# Altium PCB SumoPCB.PcbDoc (part 2 of 2)
Units mm, origin at the board's own origin, x right, y up, seen from the top; angles counter-clockwise.
Board outline 140 x 140 mm, 2 copper layers (Top Layer, Bottom Layer); 162 components, 184 nets, 713 pads, 374 vias.
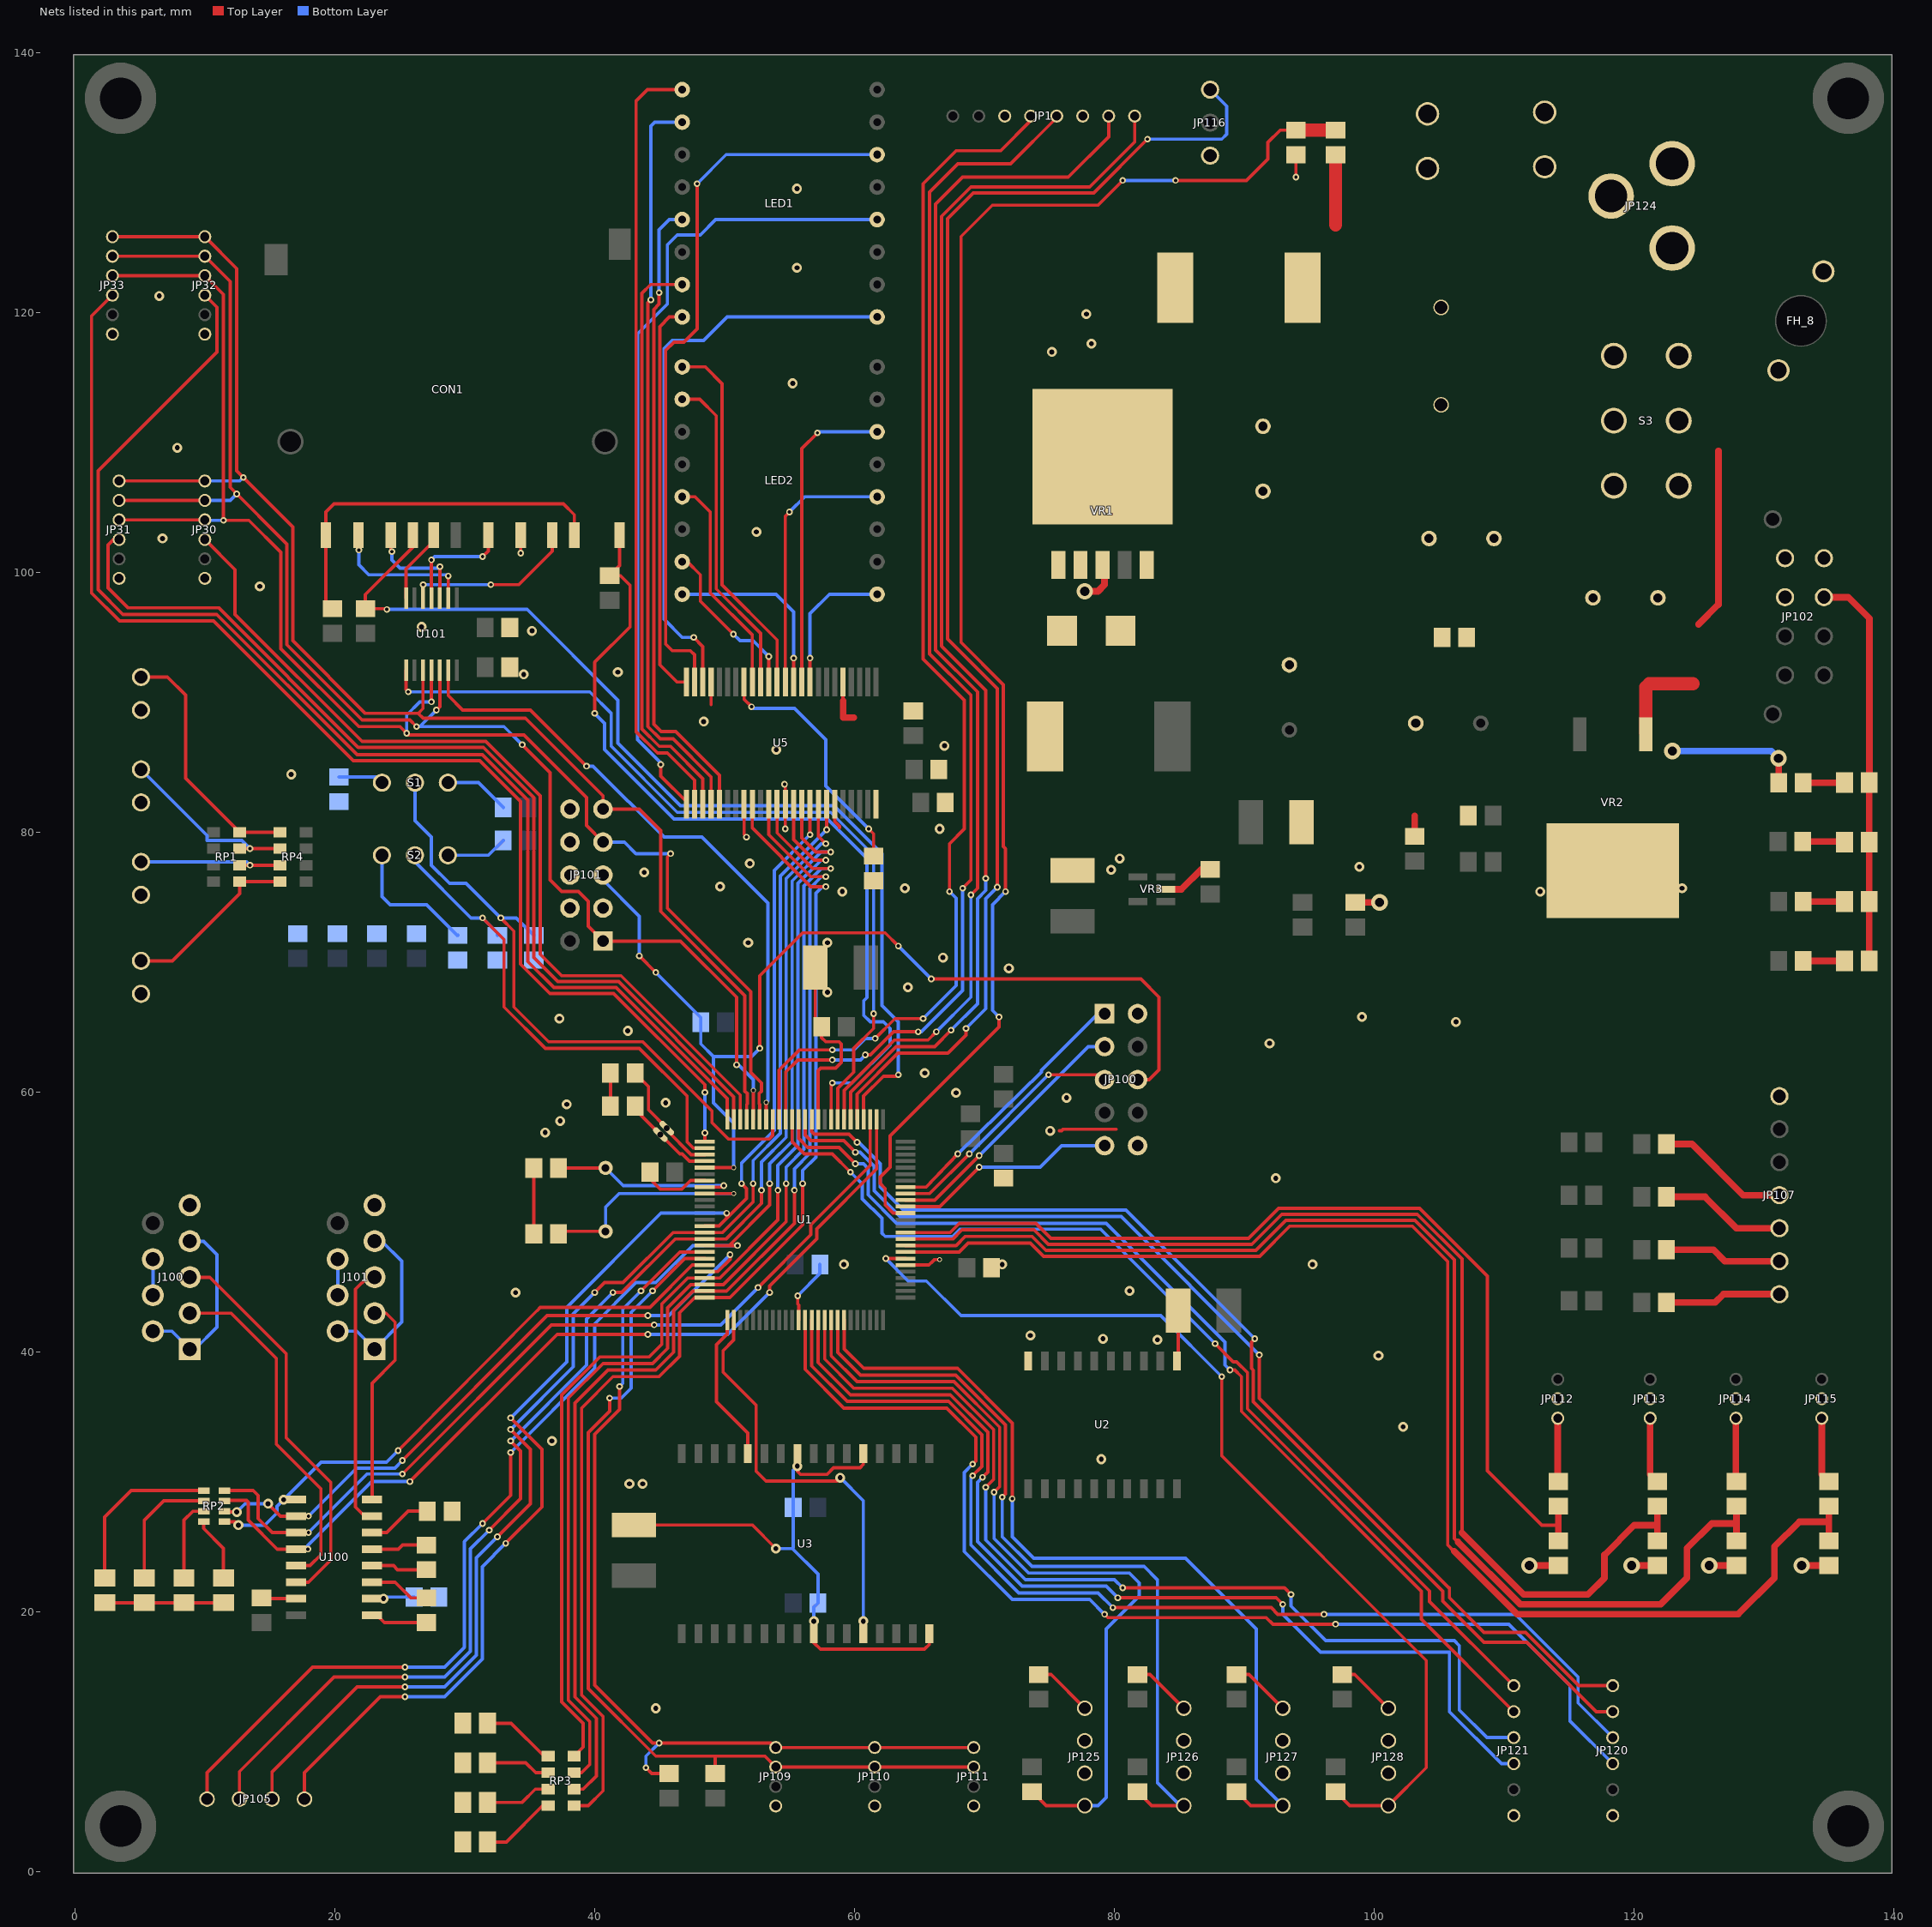
[diagram p2: the nets of this part, all layers, seen from the top]

## Via types
v1: diameter 0.508, hole 0.254, Top Layer to Bottom Layer, 222 vias
v2: diameter 0.762, hole 0.381, Top Layer to Bottom Layer, 100 vias
v3: diameter 1.27, hole 0.711, Top Layer to Bottom Layer, 39 vias
v4: diameter 0.889, hole 0.508, Top Layer to Bottom Layer, 7 vias
v5: diameter 0.381, hole 0.254, Top Layer to Bottom Layer, 6 vias

## Nets (pads, with @x,y where several pads share a name; then routed paths per layer and width w, separated by ;. In a path a pad name is that pad's centre, name@x,y a point inside that pad or via, vN(x,y) a via of type N, cw(c..) or ccw(c..) an arc to the next point about the centre after c; other vN are vias at no path point) (continued)
GND: C1.2 C2.2 C3.2 C4.1 C5.1 C6.1 C7.1 C10.1 C11.1 C12.1 C13.1 C14.1 C15.1 C39.2 C40.2 C41.2 C42.2 C43.2 C44.2 C45.2 C46.2 C47.2 C48.1 C49.1 C60.1 C61.2 C103.2 C104.2 C105.2 C110.1 C111.1 C113.2 C114.2 C115.1 C130.1 C131.1 C132.1 C133.1 CON1.3 CON1.6 D1.1 DS1.2 DS2.2 DS3.2 DS4.2 DS5.2 DS6.2 DS7.2 DS8.2 DS10.2 DS11.2 DS12.2 DS13.2 J100.5 J101.5 JP1.3 JP1.6 JP30.1 JP31.1 JP32.1 JP33.1 JP100.2 JP100.10 JP101.3 JP101.4 JP101.6 JP101.8 JP101.10 JP102.1 JP102.2 JP102.5 JP102.6 JP107.1 JP109.1 JP110.1 JP111.1 JP112.2 JP113.2 JP114.2 JP115.2 JP116.1 JP120.1 JP121.1 JP122.2 JP123.2 JP124.2 JP124.3 JP125.2 JP125.3 JP126.2 JP126.3 JP127.2 JP127.3 JP128.2 JP128.3 JP130.1 JP131.1 JP132.1 JP133.1 R2.1 R67.2 R68.2 R71.1 R73.1 R75.1 R77.1 R119.1 R202.2 R204.2 R206.2 S3.1 S3.4 U1.11 U1.32 U1.62 U1.81 U2.1 U2.10 U3.5 U3.9 U3.25 U3.32 U5.5 U5.21 U5.37 U5.43 U5.48 U100.15 U101.7 VR1.3 VR1.5 VR2.4 VR3.2 | length 169.2
  Top Layer w0.254: DS10.2@2.286,20.701 DS13.2@11.43,20.701 ; C105.2@14.412,21.016 U100.15@17.014,21.016 ; U101.7@25.482,98.025 25.482,100.285 27.604,102.407 CON1.3@27.604,102.87 ; v1(34.304,101.487) CON1.6@34.304,102.87 ; C5.1@35.316,49.086 C4.1@35.316,54.166 ; C6.1@41.214,58.928 C7.1@41.214,61.468 ; C3.2@43.026,26.688 52.125,26.688 v2(53.948,24.865) ; C11.1@44.262,53.848 44.262,53.325 45.06,52.527 46.71,52.527 47.142,52.959 47.375,53.192 U1.32@48.478,53.192 ; 48.959,89.833 U5.21@48.959,91.568 ; v1(54.61,83.693) 54.673,83.629 v1(54.673,80.264) ; U3.9@55.599,32.171 55.599,30.834 55.853,30.58 57.885,30.58 58.393,31.088 60.425,31.088 60.679,31.342 U3.5@60.679,32.171 ; v1(55.626,44.323) 55.626,43.681 55.703,43.604 U1.62@55.703,42.467 ; v2(56.869,19.277) 56.869,17.626 57.377,17.118 65.378,17.118 65.759,17.499 U3.32@65.759,18.321 ; C1.2@56.978,69.596 56.978,65.516 C10.1@57.47,65.024 57.47,64.196 57.785,63.881 58.801,63.881 58.979,63.703 58.979,62.281 58.547,61.849 57.404,61.849 57.203,61.648 U1.11@57.203,57.917 ; U5.43@58.483,82.168 58.483,80.835 58.855,80.464 58.855,80.369 ; 59.118,90.106 U5.5@59.118,91.568 ; U1.81@63.928,46.692 65.73,46.692 66.028,46.99 66.04,46.99 66.167,47.117 v5(66.548,47.117) ; 75.768,57.023 75.946,57.023 76.073,57.15 80.151,57.15 ; U2.1@84.809,39.315 84.918,39.424 C2.2@84.918,43.18 ; v1(93.98,130.429) R202.2@93.98,132.146
  Top Layer w0.508: 59.118,90.106 59.118,88.837 59.944,88.837 ; VR3.2@83.955,75.616 85.166,75.616 86.7,77.15 C43.2@87.376,77.15 ; R206.2@98.552,74.61 v3(100.416,74.61) ; R204.2@103.124,79.69 103.124,81.28 ; v3(111.953,23.561) R71.1@114.173,23.561 ; v3(119.822,23.561) R73.1@121.793,23.561 ; v3(125.791,23.561) R75.1@127.889,23.561 ; v3(132.908,23.561) R77.1@135.001,23.561 ; JP102.2@134.62,98.092 136.477,98.092 138.125,96.444 138.125,83.835 DS1.2@138.11,83.82 DS3.2@138.11,74.676 DS8.2@138.11,70.104
  Top Layer w0.52: v3(77.724,98.552) 78.74,98.552 79.248,99.06 VR1.3@79.248,99.822
  Bottom Layer w0.254: v2(53.948,24.865) 55.218,24.865 ; v2(55.599,31.215) 55.284,30.9 55.284,24.931 55.218,24.865 ; v1(55.626,44.323) 57.338,46.035 C12.1@57.338,46.736 ; v2(56.869,19.277) 56.869,20.359 C13.1@57.184,20.674 57.184,22.899 55.218,24.865
  other v2: 44.704,12.573 42.672,29.845 43.688,29.845 78.994,31.75 36.703,33.147 102.235,34.239 100.33,39.726 83.312,40.945 79.121,41.021 73.533,41.275 33.909,44.577 81.178,44.704 59.182,46.736 71.374,46.736 95.25,46.736 92.42,53.372 36.195,56.896 75.057,57.023 37.338,57.785 37.846,59.055 45.466,59.182 76.327,59.563 67.818,59.944 65.405,61.468 91.948,63.754 42.545,64.719 106.299,65.405 37.287,65.659 99.06,65.786 57.912,67.691 64.11,68.072 71.882,69.532 66.802,70.358 51.816,71.501 57.912,71.501 59.055,75.438 112.776,75.438 63.881,75.692 123.698,75.692 49.657,75.819 43.815,76.911 79.756,77.114 98.857,77.343 51.943,77.597 80.416,77.978 66.548,80.264 16.637,84.455 53.975,86.36 66.929,86.665 48.387,88.519 34.544,92.151 41.783,92.329 35.179,95.504 26.67,95.809 14.224,98.933 6.731,102.616 52.451,103.124 7.874,109.601 55.245,114.554 75.184,116.967 78.232,117.602 77.851,119.888 6.477,121.285 55.575,123.444 55.575,129.54
IRD1: R70.1 R71.2 U1.86 | length 73.5
  Top Layer w0.254: U1.86@63.928,49.192 67.353,49.192 68.072,49.911 73.949,49.911 75.117,48.743 90.322,48.743 92.634,51.054 103.505,51.054 108.712,45.847 108.712,30.861 112.903,26.67 114.173,26.67
  Top Layer w0.508: R71.2@114.173,25.461 R70.1@114.173,28.133
IRD2: R72.1 R73.2 U1.85 | length 90
  Top Layer w0.254: U1.85@63.928,48.692 67.556,48.692 68.267,49.403 73.81,49.403 74.928,48.285 90.576,48.285 92.888,50.597 103.316,50.597 106.756,47.156 106.756,26.086
  Top Layer w0.508: 106.756,26.086 111.506,21.336 116.459,21.336 117.729,22.606 117.729,24.384 120.015,26.67 121.793,26.67 ; R73.2@121.793,25.461 R72.1@121.793,28.133
IRD3: R74.1 R75.2 U1.84 | length 97
  Top Layer w0.254: U1.84@63.928,48.192 67.81,48.192 68.513,48.895 73.672,48.895 74.738,47.828 90.881,47.828 93.193,50.14 103.126,50.14 106.172,47.094 106.172,25.654 106.451,25.375
  Top Layer w0.508: 106.451,25.375 111.252,20.574 122.047,20.574 124.079,22.606 124.079,24.892 125.984,26.797 127.889,26.797 ; R75.2@127.889,25.461 R74.1@127.889,28.133
IRD4: R76.1 R77.2 U1.83 | length 104.9
  Top Layer w0.254: U1.83@63.928,47.692 68.062,47.692 68.757,48.387 73.533,48.387 74.549,47.371 91.186,47.371 93.497,49.682 102.937,49.682 105.664,46.955 105.664,25.146 106.147,24.663
  Top Layer w0.508: 106.147,24.663 110.998,19.812 128.016,19.812 130.81,22.606 130.81,25.019 132.715,26.924 135.001,26.924 ; R77.2@135.001,25.461 R76.1@135.001,28.133
LED_BLANK: JP105.1 U1.42 U5.39 | length 110.1
  Top Layer w0.254: JP105.1@10.16,5.588 10.16,7.62 18.288,15.748 v1(25.4,15.748) ; v1(31.369,26.797) 33.528,28.956 v1(33.528,32.258) ; U1.42@48.478,48.192 v1(50.986,48.192) ; 50.351,48.192 53.467,51.308 v1(53.467,52.959) ; U5.39@55.944,82.168 55.944,79.566 57.023,78.486 v1(58.166,78.486)
  Bottom Layer w0.254: v1(25.4,15.748) 28.448,15.748 29.972,17.272 29.972,25.4 v1(31.369,26.797) ; v1(33.528,32.258) 40.005,38.735 40.005,42.164 43.18,45.339 44.704,45.339 47.557,48.192 v1(50.986,48.192) ; v1(53.467,52.959) 53.467,54.483 55.194,56.21 55.194,76.253 57.427,78.486 v1(58.166,78.486)
LED_CSEL0: RP3.8 U1.47 U5.38 | length 88.1
  Top Layer w0.254: RP3.8@38.42,8.89 39.116,9.586 39.116,11.418 37.465,13.069 37.465,36.703 40.386,39.624 44.196,39.624 45.161,40.589 45.161,43.702 47.151,45.692 49.629,45.692 54.102,50.165 v1(54.102,52.451) ; U5.38@55.308,82.168 55.308,79.438 56.896,77.851 v1(57.785,77.851)
  Bottom Layer w0.254: v1(54.102,52.451) 54.102,54.356 55.651,55.905 55.651,76.064 57.439,77.851 v1(57.785,77.851)
LED_CSEL1: RP3.7 U1.48 U5.36 | length 91.1
  Top Layer w0.254: RP3.7@38.42,7.62 38.989,7.62 39.624,8.255 39.624,11.557 37.973,13.208 37.973,36.449 40.64,39.116 44.45,39.116 45.618,40.284 45.618,43.395 47.401,45.178 47.401,45.192 49.891,45.192 54.737,50.038 v1(54.737,52.959) ; U5.36@54.038,82.168 54.038,79.947 56.769,77.216 v1(58.166,77.216)
  Bottom Layer w0.254: v1(54.737,52.959) 54.737,54.229 56.109,55.601 56.109,75.874 57.45,77.216 v1(58.166,77.216)
LED_CSEL2: RP3.6 U1.49 U5.35 | length 92
  Top Layer w0.254: RP3.6@38.42,6.35 39.116,6.35 40.132,7.366 40.132,11.799 38.481,13.45 38.481,36.068 41.021,38.608 44.704,38.608 46.076,39.98 46.076,43.205 47.562,44.692 50.153,44.692 55.372,49.911 v1(55.372,52.451) ; U5.35@53.404,82.168 53.404,79.819 56.642,76.581 v1(57.785,76.581)
  Bottom Layer w0.254: v1(55.372,52.451) 55.372,54.102 56.566,55.296 56.566,75.685 57.462,76.581 v1(57.785,76.581)
LED_D\S\E\L\: RP3.5 U1.50 U5.33 | length 93.9
  Top Layer w0.254: RP3.5@38.42,5.08 39.497,5.08 40.64,6.223 40.64,11.938 38.989,13.589 38.989,35.687 41.402,38.1 44.958,38.1 46.533,39.675 46.533,43.016 47.708,44.192 50.415,44.192 56.007,49.784 v1(56.007,52.959) ; U5.33@52.133,82.168 52.133,80.328 56.642,75.819 v1(57.785,75.819)
  Bottom Layer w0.254: v1(56.007,52.959) 56.007,53.975 57.023,54.991 57.023,75.311 57.531,75.819 v1(57.785,75.819)
LED_L\A\T\C\H\: JP105.2 U1.41 U5.41 | length 104
  Top Layer w0.254: JP105.2@12.66,5.588 12.66,7.707 19.939,14.986 v1(25.4,14.986) ; v1(31.877,26.289) 34.29,28.702 34.29,32.385 v1(33.528,33.147) ; v1(41.402,44.577) 42.072,44.577 46.186,48.692 50.089,48.692 52.832,51.435 v1(52.832,52.451) ; U5.41@57.214,82.168 57.214,79.692 v1(57.785,79.121)
  Bottom Layer w0.254: v1(25.4,14.986) 28.448,14.986 30.429,16.967 30.429,24.841 v1(31.877,26.289) ; v1(33.528,33.147) 39.37,38.989 39.37,42.545 v1(41.402,44.577) ; v1(52.832,52.451) 52.832,54.61 54.737,56.515 54.737,76.442 57.416,79.121 v1(57.785,79.121)
LED_SCLK: JP105.4 U1.39 U5.40 | length 103.6
  Top Layer w0.254: JP105.4@17.66,5.588 17.66,7.627 23.495,13.462 v1(25.4,13.462) ; v1(33.147,25.273) 35.941,28.067 35.941,32.512 v1(33.528,34.925) ; U1.39@48.478,49.692 49.565,49.692 51.689,51.816 51.689,52.578 v1(51.308,52.959) ; 50.155,50.282 v1(50.155,50.683) ; v1(56.578,79.819) U5.40@56.578,82.168
  Bottom Layer w0.254: v1(25.4,13.462) 28.448,13.462 31.344,16.358 31.344,23.47 v1(33.147,25.273) ; v1(33.528,34.925) 37.846,39.243 37.846,43.434 45.095,50.683 v1(50.155,50.683) ; v1(51.308,52.959) 51.308,54.559 53.823,57.074 53.823,77.064 v1(56.578,79.819)
LED_SIN: JP105.3 U1.40 U5.42 | length 102.5
  Top Layer w0.254: JP105.3@15.16,5.588 15.16,7.667 21.717,14.224 v1(25.4,14.224) ; v1(32.512,25.781) 35.052,28.321 35.052,32.512 v1(33.528,34.036) ; v1(40.005,44.577) 40.767,45.339 42.187,45.339 46.04,49.192 49.827,49.192 52.197,51.562 v1(52.197,52.959) ; v1(57.848,80.2) U5.42@57.848,82.168
  Bottom Layer w0.254: v1(25.4,14.224) 28.448,14.224 30.886,16.662 30.886,24.155 v1(32.512,25.781) ; v1(33.528,34.036) 38.354,38.862 38.354,42.926 v1(40.005,44.577) ; v1(52.197,52.959) 52.197,54.737 54.28,56.82 54.28,76.632 v1(57.848,80.2)
LED_SOUT: U5.32 | length 2.6
  Top Layer w0.254: U5.32@51.498,82.168 51.498,79.82 v1(51.689,79.629)
LINE1: JP125.1 R100.2 U1.67 | length 63.3
  Top Layer w0.254: U1.67@58.203,42.467 58.203,39.714 60.198,37.719 67.656,37.719 71.171,34.204 71.171,29.642 v1(70.739,29.21) ; R100.2@73.66,6.162 74.742,5.08 JP125.1@77.724,5.08
  Bottom Layer w0.254: v1(70.739,29.21) 70.739,25.654 73.406,22.987 81.153,22.987 81.915,22.225 81.915,21.209 79.375,18.669 79.375,5.715 78.74,5.08 JP125.1@77.724,5.08
LINE2: JP126.1 R102.2 U1.68 | length 62.1
  Top Layer w0.254: U1.68@58.703,42.467 58.703,39.976 60.452,38.227 67.795,38.227 71.628,34.394 71.628,29.083 v1(71.374,28.829) ; R102.2@81.788,6.162 82.87,5.08 JP126.1@85.344,5.08
  Bottom Layer w0.254: v1(71.374,28.829) 71.374,25.781 73.66,23.495 82.296,23.495 83.312,22.479 83.312,6.858 85.09,5.08 JP126.1@85.344,5.08
LINE3: JP127.1 R104.2 U1.69 | length 66.5
  Top Layer w0.254: U1.69@59.203,42.467 59.203,40.238 60.706,38.735 67.933,38.735 72.136,34.532 v1(72.136,28.702) ; R104.2@89.408,6.162 90.49,5.08 JP127.1@92.964,5.08
  Bottom Layer w0.254: v1(72.136,28.702) 72.136,25.781 73.787,24.13 85.471,24.13 90.932,18.669 90.932,7.112 JP127.1@92.964,5.08
LINE4: JP128.1 R106.2 U1.82 | length 76.4
  Top Layer w0.254: v1(62.409,47.192) U1.82@63.928,47.192 ; v1(88.265,38.1) 88.265,32.004 104.013,16.256 104.013,8.001 JP128.1@101.092,5.08 98.11,5.08 R106.2@97.028,6.162
  Bottom Layer w0.254: v1(62.409,47.192) 64.135,45.466 65.532,45.466 68.199,42.799 83.566,42.799 v1(88.265,38.1)
MOT1_PWM_A: JP1.5 U1.16 | length 95.2
  Top Layer w0.254: U1.16@54.703,57.917 54.703,61.549 55.638,62.484 v1(58.293,62.484) ; v1(60.833,62.865) 61.214,62.865 62.992,64.643 v1(64.897,64.643) ; v1(68.326,75.692) 68.961,76.327 68.961,90.551 65.786,93.726 65.786,129.286 67.945,131.445 72.009,131.445 75.564,135 JP1.5@75.564,135.128
  Bottom Layer w0.254: v1(58.293,62.484) 60.452,62.484 v1(60.833,62.865) ; v1(64.897,64.643) 65.151,64.643 68.326,67.818 v1(68.326,75.692)
MOT1_PWM_B: JP1.4 U1.17 | length 94.5
  Top Layer w0.254: U1.17@54.203,57.917 54.203,61.696 55.753,63.246 v1(58.293,63.246) ; v1(61.595,64.135) 63.119,65.659 v1(65.278,65.659) ; v1(67.31,75.438) 67.31,79.121 68.453,80.264 68.453,90.17 65.278,93.345 65.278,129.921 67.818,132.461 71.247,132.461 73.564,134.778 JP1.4@73.564,135.128
  Bottom Layer w0.254: v1(58.293,63.246) 59.944,63.246 60.833,64.135 v1(61.595,64.135) ; v1(65.278,65.659) 67.818,68.199 67.818,74.93 v1(67.31,75.438)
MOT2_PWM_A: JP1.8 U1.6 | length 96.2
  Top Layer w0.254: U1.6@59.703,57.917 59.703,59.996 63.206,63.5 66.167,63.5 v1(67.437,64.77) ; v1(70.104,76.454) 70.104,90.932 66.7,94.336 66.7,127.406 68.961,129.667 78.105,129.667 81.564,133.126 JP1.8@81.564,135.128
  Bottom Layer w0.254: v1(67.437,64.77) 69.469,66.802 69.469,74.896 70.104,75.531 v1(70.104,76.454)
MOT2_PWM_B: JP1.7 U1.7 | length 94.6
  Top Layer w0.254: U1.7@59.203,57.917 59.203,60.143 63.068,64.008 65.659,64.008 v1(66.294,64.643) ; v1(68.961,75.184) 69.469,75.692 69.469,90.805 66.243,94.031 66.243,128.346 68.326,130.429 76.454,130.429 79.564,133.539 JP1.7@79.564,135.128
  Bottom Layer w0.254: v1(66.294,64.643) 68.961,67.31 v1(68.961,75.184)
MOUSE1_X1: JP120.3 U1.63 | length 86.5
  Top Layer w0.254: U1.63@56.203,42.467 56.203,38.666 59.182,35.687 67.102,35.687 69.342,33.447 69.342,31.623 v1(69.088,31.369) ; v1(79.248,19.812) 79.502,19.558 91.694,19.558 92.202,19.05 v1(97.028,19.05)
  Bottom Layer w0.254: v1(69.088,31.369) 68.453,30.734 68.453,24.638 72.136,20.955 78.105,20.955 v1(79.248,19.812) ; v1(97.028,19.05) 110.363,19.05 115.062,14.351 115.062,11.62 JP120.3@118.364,8.318
MOUSE1_X2: JP120.5 U1.12 | length 85.7
  Top Layer w0.254: U1.12@56.703,57.917 56.703,56.962 56.896,56.769 59.563,56.769 v1(60.198,56.134) ; 90.703,38.583 90.703,36.17 105.283,21.59 105.283,20.828 108.458,17.653 111.76,17.653 117.095,12.318 JP120.5@118.364,12.318 ; 90.703,38.594 90.551,38.747 90.551,40.767 v1(90.805,41.021)
  Bottom Layer w0.254: v1(60.198,56.134) 60.325,56.134 61.976,54.483 61.976,52.705 63.754,50.927 80.899,50.927 v1(90.805,41.021)
MOUSE1_Y1: JP120.4 U1.64 | length 84.4
  Top Layer w0.254: U1.64@56.703,42.467 56.703,38.928 59.436,36.195 67.241,36.195 69.799,33.636 69.799,31.191 v1(69.088,30.48) ; v1(79.883,20.32) 92.075,20.32 92.583,19.812 v1(96.139,19.812)
  Bottom Layer w0.254: v1(69.088,30.48) 68.961,30.353 68.961,25.146 72.644,21.463 78.74,21.463 v1(79.883,20.32) ; v1(96.139,19.812) 110.871,19.812 115.697,14.986 115.697,12.985 JP120.4@118.364,10.318
MOUSE1_Y2: JP120.6 U1.13 | length 84.5
  Top Layer w0.254: U1.13@56.203,57.917 56.203,56.7 56.642,56.261 59.182,56.261 v1(60.071,55.372) ; v1(91.161,39.776) 91.161,36.424 105.74,21.844 105.791,21.844 105.791,21.082 108.458,18.415 111.645,18.415 115.742,14.318 JP120.6@118.364,14.318
  Bottom Layer w0.254: v1(60.071,55.372) 60.44,55.372 61.519,54.294 61.519,52.4 63.5,50.419 80.518,50.419 v1(91.161,39.776)
MOUSE2_X1: JP121.3 U1.65 | length 78.8
  Top Layer w0.254: U1.65@57.203,42.467 57.203,39.19 59.69,36.703 67.379,36.703 70.256,33.826 70.256,30.759 v1(69.85,30.353) ; v1(80.264,21.082) 92.456,21.082 v1(92.964,20.574)
  Bottom Layer w0.254: v1(69.85,30.353) 69.469,29.972 69.469,25.4 72.898,21.971 79.375,21.971 v1(80.264,21.082) ; v1(92.964,20.574) 92.964,19.812 95.885,16.891 105.791,16.891 105.791,12.319 109.792,8.318 JP121.3@110.744,8.318
MOUSE2_X2: JP121.5 U1.14 | length 79.8
  Top Layer w0.254: U1.14@55.703,57.917 55.703,56.438 56.388,55.753 58.801,55.753 v1(60.071,54.483) ; v1(88.9,38.608) 89.281,38.608 89.789,38.1 89.789,35.433 103.632,21.59 103.632,19.43 JP121.5@110.744,12.318
  Bottom Layer w0.254: v1(60.071,54.483) 60.683,54.483 61.062,54.104 61.062,52.095 63.246,49.911 79.375,49.911 88.519,40.767 88.519,38.989 v1(88.9,38.608)
MOUSE2_Y1: JP121.4 U1.66 | length 77.4
  Top Layer w0.254: U1.66@57.703,42.467 57.703,39.452 59.944,37.211 67.518,37.211 70.714,34.015 70.714,30.201 v1(70.104,29.591) ; v1(80.645,21.844) 93.091,21.844 v1(93.599,21.336)
  Bottom Layer w0.254: v1(70.104,29.591) 70.104,25.527 73.152,22.479 80.01,22.479 v1(80.645,21.844) ; v1(93.599,21.336) 93.599,20.447 96.266,17.78 106.172,17.78 106.553,17.399 106.553,12.446 108.681,10.318 JP121.4@110.744,10.318
MOUSE2_Y2: JP121.6 U1.15 | length 78.5
  Top Layer w0.254: U1.15@55.203,57.917 55.203,56.176 56.134,55.245 58.293,55.245 v1(59.69,53.848) ; v1(87.757,40.64) 89.154,39.243 89.408,39.243 90.246,38.405 90.246,35.622 104.267,21.602 104.267,20.795 JP121.6@110.744,14.318
  Bottom Layer w0.254: v1(59.69,53.848) 60.604,52.934 60.604,51.791 62.103,50.292 62.103,49.149 62.357,48.895 67.564,48.895 68.123,49.454 78.943,49.454 v1(87.757,40.64)
NetC40_1: C40.1 L1.2 VR1.2
NetC100_1: C100.1 U100.3 | length 4.7
  Top Layer w0.254: U100.3@22.864,22.286 24.638,22.286 25.847,21.077 C100.1@27.051,21.077
NetC100_2: C100.2 U100.1 | length 4.4
  Top Layer w0.254: U100.1@22.864,19.746 23.241,19.746 23.81,19.177 C100.2@27.051,19.177
NetC101_1: C101.1 U100.5 | length 4.3
  Top Layer w0.254: U100.5@22.864,24.826 24.892,24.826 25.207,25.141 C101.1@27.051,25.141
NetC101_2: C101.2 U100.4 | length 4.3
  Top Layer w0.254: U100.4@22.864,23.556 24.511,23.556 24.826,23.241 C101.2@27.051,23.241
NetC103_1: C103.1 U100.2 | length 3.3
  Top Layer w0.254: U100.2@22.864,21.016 v2(23.749,21.016)
  Bottom Layer w0.254: v2(23.749,21.016) 23.876,21.143 C103.1@26.101,21.143
NetC104_1: C104.1 U100.6 | length 4.9
  Top Layer w0.254: U100.6@22.864,26.096 24.003,26.096 25.654,27.747 C104.1@27.117,27.747
NetCON1_1: CON1.1 U101.2 | length 11.2
  Top Layer w0.254: CON1.1@21.804,102.87 21.804,101.767 v1(21.844,101.727) ; U101.2@28.732,98.025 v1(28.732,99.725)
  Bottom Layer w0.254: v1(21.844,101.727) 21.844,100.584 22.606,99.822 28.635,99.822 v1(28.732,99.725)
NetCON1_2: CON1.2 U101.3 | length 8.4
  Top Layer w0.254: CON1.2@24.304,102.87 24.304,101.68 v1(24.384,101.6) ; U101.3@28.082,98.025 v1(28.082,100.442)
  Bottom Layer w0.254: v1(24.384,101.6) 24.384,100.965 25.019,100.33 27.97,100.33 v1(28.082,100.442)
NetCON1_5: CON1.5 U101.4 | length 8.8
  Top Layer w0.254: U101.4@27.432,98.025 v1(27.432,100.965) ; v1(31.369,101.219) 31.804,101.654 CON1.5@31.804,102.87
  Bottom Layer w0.254: v1(27.432,100.965) 27.686,101.219 v1(31.369,101.219)
NetCON1_7: CON1.7 U101.5 | length 13.3
  Top Layer w0.254: U101.5@26.782,98.025 26.782,99.045 v1(26.797,99.06) ; v1(32.004,99.06) 34.163,99.06 36.734,101.631 CON1.7@36.734,102.87
  Bottom Layer w0.254: v1(26.797,99.06) v1(32.004,99.06)
NetCON1_8: CON1.8 CON1.9 R118.1 | length 29
  Top Layer w0.254: R118.1@19.812,97.216 19.304,97.724 19.304,104.648 19.939,105.283 37.592,105.283 38.434,104.441 CON1.8@38.434,102.87
NetD1_2: D1.2 L2.1 VR1.1
NetDS1_1: DS1.1 R3.1 | length 3.2
  Top Layer w0.508: R3.1@133.03,83.82 DS1.1@136.21,83.82
NetDS2_1: DS2.1 R4.1 | length 3.2
  Top Layer w0.508: R4.1@132.994,79.299 DS2.1@136.159,79.299
NetDS3_1: DS3.1 R5.1 | length 3.2
  Top Layer w0.508: R5.1@133.03,74.676 DS3.1@136.21,74.676
NetDS4_1: DS4.1 RP3.1 | length 5.7
  Top Layer w0.254: DS4.1@31.75,11.43 33.553,11.43 36.093,8.89 RP3.1@36.42,8.89
NetDS5_1: DS5.1 RP3.2 | length 5
  Top Layer w0.254: DS5.1@31.75,8.382 34.696,8.382 35.458,7.62 RP3.2@36.42,7.62
NetDS6_1: DS6.1 RP3.3 | length 5.1
  Top Layer w0.254: DS6.1@31.75,5.334 34.417,5.334 35.433,6.35 RP3.3@36.42,6.35
NetDS7_1: DS7.1 RP3.4 | length 5.8
  Top Layer w0.254: DS7.1@31.75,2.286 33.198,2.286 35.992,5.08 RP3.4@36.42,5.08
NetDS8_1: DS8.1 R10.1 | length 3.2
  Top Layer w0.508: R10.1@133.03,70.104 DS8.1@136.21,70.104
NetDS10_1: DS10.1 RP2.1 | length 13.2
  Top Layer w0.254: DS10.1@2.286,22.601 2.286,27.305 4.318,29.337 RP2.1@9.906,29.337
NetDS11_1: DS11.1 RP2.2 | length 9.6
  Top Layer w0.254: DS11.1@5.334,22.601 5.334,27.051 6.82,28.537 RP2.2@9.906,28.537
NetDS12_1: DS12.1 RP2.3 | length 6.3
  Top Layer w0.254: DS12.1@8.382,22.601 8.382,27.051 9.068,27.737 RP2.3@9.906,27.737
NetDS13_1: DS13.1 RP2.4 | length 5
  Top Layer w0.254: RP2.4@9.906,26.937 9.906,26.416 11.43,24.892 DS13.1@11.43,22.601
NetFH_8_2: FH_8.2 S3.3 S3.6
NetJ100_1: J100.1 J100.4 J100.6 | length 14.3
  Bottom Layer w0.254: J100.6@5.996,41.598 7.451,41.598 J100.1@8.836,40.213 9.225,40.213 10.922,41.91 10.922,47.498 9.897,48.523 J100.4@8.836,48.523
NetJ100_2: J100.2 U100.13 | length 26.9
  Top Layer w0.254: J100.2@8.836,42.983 12.008,42.983 15.494,39.497 15.494,32.893 18.923,29.464 18.923,24.384 18.095,23.556 U100.13@17.014,23.556
NetJ100_3: J100.3 U100.14 | length 30.5
  Top Layer w0.254: J100.3@8.836,45.753 10.381,45.753 16.256,39.878 16.256,33.401 19.685,29.972 19.685,24.003 17.968,22.286 U100.14@17.014,22.286
NetJ100_7: J100.7 J100.8 | length 2.8
  Bottom Layer w0.254: J100.7@5.996,44.368 J100.8@5.996,47.138
NetJ101_1: J101.1 J101.4 J101.6 | length 13.8
  Bottom Layer w0.254: J101.6@20.22,41.598 21.675,41.598 J101.1@23.06,40.213 25.146,42.299 25.146,46.99 23.613,48.523 J101.4@23.06,48.523
NetJ101_2: J101.2 U100.8 | length 16.3
  Top Layer w0.254: U100.8@22.864,28.636 22.864,37.596 24.638,39.37 24.638,42.291 23.946,42.983 J101.2@23.06,42.983
NetJ101_3: J101.3 U100.7 | length 20.2
  Top Layer w0.254: U100.7@22.864,27.366 22.291,27.366 21.59,28.067 21.59,44.831 22.512,45.753 J101.3@23.06,45.753
NetJ101_7: J101.7 J101.8 | length 2.8
  Bottom Layer w0.254: J101.7@20.22,44.368 J101.8@20.22,47.138
NetJP107_4: JP107.4 R120.2 | length 10.3
  Top Layer w0.508: R120.2@122.489,56.007 124.46,56.007 128.397,52.07 JP107.4@131.191,52.07
NetJP107_5: JP107.5 R122.2 | length 9.7
  Top Layer w0.508: R122.2@122.489,51.943 125.476,51.943 127.889,49.53 JP107.5@131.191,49.53
NetJP107_6: JP107.6 R124.2 | length 9.1
  Top Layer w0.508: R124.2@122.489,47.879 126.111,47.879 127,46.99 JP107.6@131.191,46.99
NetJP107_7: JP107.7 R126.2 | length 9
  Top Layer w0.508: R126.2@122.489,43.815 126.238,43.815 126.873,44.45 JP107.7@131.191,44.45
NetJP112_1: JP112.1 R70.2 | length 4.9
  Top Layer w0.508: JP112.1@114.132,34.901 114.132,30.074 R70.2@114.173,30.033
NetJP113_1: JP113.1 R72.2 | length 5.1
  Top Layer w0.508: JP113.1@121.244,34.901 121.244,30.582 R72.2@121.793,30.033
NetJP114_1: JP114.1 R74.2 | length 4.9
  Top Layer w0.508: JP114.1@127.848,34.901 127.848,30.074 R74.2@127.889,30.033
NetJP115_1: JP115.1 R76.2 | length 5.1
  Top Layer w0.508: JP115.1@134.452,34.901 134.452,30.582 R76.2@135.001,30.033
NetJP125_4: JP125.4 R101.2 | length 4.6
  Top Layer w0.254: R101.2@74.168,15.174 75.13,15.174 JP125.4@77.724,12.58
NetJP126_4: JP126.4 R103.2 | length 4.6
  Top Layer w0.254: R103.2@81.788,15.174 82.75,15.174 JP126.4@85.344,12.58
NetJP127_4: JP127.4 R105.2 | length 4.6
  Top Layer w0.254: R105.2@89.408,15.174 90.37,15.174 JP127.4@92.964,12.58
NetJP128_4: JP128.4 R107.2 | length 4.6
  Top Layer w0.254: R107.2@97.536,15.174 98.498,15.174 JP128.4@101.092,12.58
NetJP130_2: JP130.2 RP1.4 RP4.1 | length 19.4
  Top Layer w0.254: JP130.2@5.08,91.948 7.112,91.948 8.509,90.551 8.509,84.169 RP1.4@12.668,80.01 RP4.1@15.78,80.01
NetJP131_2: JP131.2 RP1.3 RP4.2 | length 14.2
  Top Layer w0.254: RP1.3@12.668,78.74 RP4.2@15.78,78.74
  Bottom Layer w0.254: JP131.2@5.08,84.836 10.16,79.756 10.16,79.375 12.827,79.375 v1(13.462,78.74)
NetJP132_2: JP132.2 RP1.2 RP4.3 | length 11.6
  Top Layer w0.254: RP1.2@12.668,77.47 RP4.3@15.78,77.47
  Bottom Layer w0.254: JP132.2@5.08,77.724 13.208,77.724 v1(13.462,77.47)
NetJP133_2: JP133.2 RP1.1 RP4.4 | length 13.8
  Top Layer w0.254: JP133.2@5.08,70.104 7.493,70.104 12.668,75.279 RP1.1@12.668,76.2 RP4.4@15.78,76.2
NetR65_1: R65.1 S1.3 | length 5
  Bottom Layer w0.254: S1.3@28.702,83.82 31.054,83.82 R65.1@32.959,81.915
NetR66_1: R66.1 S2.3 | length 4.7
  Bottom Layer w0.254: S2.3@28.702,78.232 31.816,78.232 R66.1@32.959,79.375
NetR67_1: R67.1 S1.1 | length 3.5
  Bottom Layer w0.254: R67.1@20.32,84.262 23.18,84.262 S1.1@23.622,83.82
NetR68_1: R68.1 S2.1 | length 10.3
  Bottom Layer w0.254: S2.1@23.622,78.232 23.622,75.057 24.257,74.422 27.051,74.422 29.403,72.07 R68.1@29.464,72.07
NetR119_2: R119.2 U5.17 | length 19.4
  Top Layer w0.254: U5.17@51.498,91.568 51.498,90.233 v1(52.07,89.662) ; v1(61.087,80.264) 61.468,79.883 R119.2@61.468,78.166
  Bottom Layer w0.254: v1(52.07,89.662) 52.197,89.535 55.372,89.535 57.785,87.122 57.785,83.566 v1(61.087,80.264)
RD*: U1.52 U3.28 | length 32.7
  Top Layer w0.254: U1.52@50.703,42.467 50.703,41.305 50.695,41.297 50.695,40.916 49.884,40.105 49.884,38.454 52.424,35.914 52.424,30.834 53.186,30.072 58.647,30.072 v2(58.901,30.326) ; U3.28@60.679,18.321 v2(60.679,19.277)
  Bottom Layer w0.254: v2(58.901,30.326) 60.679,28.548 v2(60.679,19.277)
RESET: JP100.6 JP101.5 R11.2 U1.30 | length 80
  Top Layer w0.254: v1(43.434,70.485) v1(44.704,69.215) ; U1.30@48.478,54.192 v5(50.704,54.192) ; v1(52.705,63.373) 52.705,68.961 56.007,72.263 62.357,72.263 v1(63.373,71.247) ; v1(65.913,68.707) 82.042,68.707 83.439,67.31 83.439,61.722 82.677,60.96 JP100.6@81.788,60.96
  Bottom Layer w0.254: JP101.5@40.64,76.708 40.64,76.327 43.434,73.533 v1(43.434,70.485) ; v1(44.704,69.215) 48.172,65.747 48.172,63.715 49.149,62.738 ; v5(50.704,54.192) 50.704,57.627 49.149,59.182 49.149,62.738 ; v1(52.705,63.373) 52.07,62.738 49.149,62.738 ; v1(63.373,71.247) v1(65.913,68.707)
RXD1: RP2.7 U1.2 U100.12 | length 69.4
  Top Layer w0.254: RP2.7@11.544,28.575 13.208,28.575 13.335,28.448 13.335,27.051 15.56,24.826 v1(17.922,24.826) ; v1(25.781,30.023) 37.109,41.351 v1(44.094,41.351) ; v1(53.467,44.577) 53.467,45.085 57.099,48.717 57.099,49.479 61.703,54.083 U1.2@61.703,57.917
  Bottom Layer w0.254: v1(17.922,24.826) 17.922,25.11 22.835,30.023 v1(25.781,30.023) ; v1(44.094,41.351) 50.241,41.351 v1(53.467,44.577)
RXD2: RP2.5 U1.45 U100.9 | length 46.6
  Top Layer w0.254: RP2.5@11.506,26.937 12.306,26.937 v2(12.573,26.67) ; v2(16.063,28.636) U100.9@17.014,28.636 ; v1(24.867,32.41) 35.56,43.18 35.814,43.434 44.247,43.434 47.504,46.692 U1.45@48.478,46.692
  Bottom Layer w0.254: v2(12.573,26.67) 14.605,26.67 15.539,27.604 15.539,28.112 18.948,31.521 23.978,31.521 v1(24.867,32.41)
SCL: JP109.4 JP110.4 JP111.4 R111.1 U1.43 | length 73.4
  Top Layer w0.254: v1(41.91,37.338) 41.91,35.572 40.005,33.667 40.005,14.351 44.45,9.906 53.584,9.906 JP109.4@53.934,9.556 JP111.4@69.174,9.556 ; v1(43.561,44.704) 46.549,47.692 U1.43@48.478,47.692 ; v1(43.942,8.001) 44.389,7.554 R111.1@45.72,7.554
  Bottom Layer w0.254: v1(41.91,37.338) 42.164,37.592 42.164,43.307 v1(43.561,44.704) ; v1(43.942,8.001) 43.942,8.89 v1(44.958,9.906)
SD_CARD_DETECT: CON1.10 R108.1 U1.4 | length 79.3
  Top Layer w0.254: v1(24.003,97.155) 23.942,97.216 R108.1@22.352,97.216 22.352,98.298 26.004,101.95 CON1.10@26.004,102.87 ; U1.4@60.703,57.917 60.703,59.703 62.23,61.231 63.263,61.231 v1(63.373,61.341)
  Bottom Layer w0.254: v1(24.003,97.155) 34.798,97.155 41.783,90.17 41.783,86.868 46.609,82.042 58.42,82.042 62.103,78.359 62.103,66.675 63.373,65.405 v1(63.373,61.341)
SD_CARD_WP: CON1.11 R109.1 U1.9 | length 67.4
  Top Layer w0.254: v1(40.005,89.154) 40.005,93.091 42.723,95.809 42.723,99.009 41.976,99.756 R109.1@41.148,99.756 41.924,100.532 CON1.11@41.924,102.87 ; U1.9@58.203,57.917 58.203,60.616 v1(58.293,60.706)
  Bottom Layer w0.254: v1(40.005,89.154) 40.767,88.392 40.767,86.36 46.101,81.026 57.912,81.026 60.96,77.978 60.96,67.276 60.706,67.022 60.706,65.913 61.214,65.405 62.23,65.405 62.738,64.897 62.738,63.627 59.817,60.706 v1(58.293,60.706)
SD_TRI_STATE: U1.8 U101.8 | length 65.7
  Top Layer w0.254: U101.8@25.482,92.475 25.482,90.977 v1(25.654,90.805) ; U1.8@58.703,57.917 58.703,60.289 59.944,61.531 59.944,63.373 61.468,64.897 v1(61.468,66.04)
  Bottom Layer w0.254: v1(25.654,90.805) 39.624,90.805 41.275,89.154 41.275,86.614 46.355,81.534 58.166,81.534 61.468,78.232 v1(61.468,66.04)
SDA: JP109.3 JP110.3 JP111.3 R110.1 U1.44 | length 71.8
  Top Layer w0.254: v1(41.148,36.449) 41.148,35.456 39.497,33.805 39.497,14.097 44.704,8.89 53.1,8.89 JP109.3@53.934,8.056 JP111.3@69.174,8.056 ; v1(44.45,44.704) 46.938,47.192 U1.44@48.478,47.192 ; R110.1@49.276,7.554 49.276,8.89
  Bottom Layer w0.254: v1(41.148,36.449) 42.037,36.449 42.799,37.211 42.799,43.053 v1(44.45,44.704)
SEG0: LED2.9 U5.9 | length 11
  Top Layer w0.254: U5.9@56.578,91.568 v1(56.578,93.408)
  Bottom Layer w0.254: v1(56.578,93.408) 56.578,96.837 58.065,98.324 LED2.9@61.736,98.324
SEG1: LED2.14 U5.10 | length 24.3
  Top Layer w0.254: U5.10@55.944,91.568 55.944,109.537 v1(57.15,110.744)
  Bottom Layer w0.254: v1(57.15,110.744) 57.23,110.824 LED2.14@61.736,110.824
SEG2: LED2.8 U5.11 | length 14.5
  Top Layer w0.254: U5.11@55.308,91.568 v1(55.308,93.408)
  Bottom Layer w0.254: LED2.8@46.736,98.324 53.949,98.324 55.308,96.965 v1(55.308,93.408)
SEG3: LED2.12 U5.12 | length 20.4
  Top Layer w0.254: U5.12@54.673,91.568 54.673,104.331 v1(54.991,104.648)
  Bottom Layer w0.254: v1(54.991,104.648) 56.167,105.824 LED2.12@61.736,105.824
SEG4: LED2.1 U5.13 | length 28.3
  Top Layer w0.254: LED2.1@46.736,115.824 48.514,115.824 49.809,114.529 49.809,99.035 54.038,94.805 U5.13@54.038,91.568
SEG5: LED2.7 U5.14 | length 12.8
  Top Layer w0.254: LED2.7@46.736,100.824 47.131,100.824 48.133,99.822 48.133,97.79 v1(50.673,95.25) ; U5.14@53.404,91.568 v1(53.404,93.535)
  Bottom Layer w0.254: v1(50.673,95.25) 51.181,94.742 52.197,94.742 v1(53.404,93.535)
SEG6: LED2.2 U5.15 | length 25
  Top Layer w0.254: LED2.2@46.736,113.324 48.093,113.324 49.352,112.065 49.352,98.73 52.768,95.313 U5.15@52.768,91.568
SEG7: LED2.5 U5.16 | length 17.1
  Top Layer w0.254: LED2.5@46.736,105.824 47.719,105.824 48.895,104.648 48.895,98.425 52.133,95.186 U5.16@52.133,91.568
SEG8: LED1.9 U5.22 | length 44.8
  Top Layer w0.254: v1(47.625,94.996) 48.323,94.297 U5.22@48.323,91.568
  Bottom Layer w0.254: v1(47.625,94.996) 46.736,94.996 45.339,96.393 45.339,117.221 45.974,117.856 48.387,117.856 50.191,119.66 LED1.9@61.736,119.66
SEG9: LED1.14 U5.23 | length 56.3
  Top Layer w0.254: U5.23@47.688,91.568 47.688,93.662 47.371,93.98 45.974,93.98 45.466,94.488 45.466,117.094 46.101,117.729 46.863,117.729 47.879,118.745 v1(47.879,129.921)
  Bottom Layer w0.254: v1(47.879,129.921) 50.118,132.16 LED1.14@61.736,132.16
SEG10: LED1.8 U5.24 | length 30.7
  Top Layer w0.254: LED1.8@46.736,119.66 45.746,119.66 45.009,118.923 45.009,92.888 46.329,91.568 U5.24@47.053,91.568
SEG11: LED1.12 U5.25 | length 62.5
  Top Layer w0.254: v1(45.085,85.217) 45.085,84.328 47.053,82.359 U5.25@47.053,82.168
  Bottom Layer w0.254: v1(45.085,85.217) 45.085,85.344 43.307,87.122 43.307,118.364 45.593,120.65 45.593,125.222 46.355,125.984 48.133,125.984 49.309,127.16 LED1.12@61.736,127.16
SEG12: LED1.1 U5.26 | length 60.3
  Top Layer w0.254: LED1.1@46.736,137.16 44.069,137.16 43.18,136.271 43.18,87.757 44.831,86.106 45.593,86.106 47.688,84.01 U5.26@47.688,82.168
SEG13: LED1.7 U5.27 | length 45.2
  Top Layer w0.254: LED1.7@46.736,122.16 44.309,122.16 43.637,121.488 43.637,87.946 44.97,86.614 45.847,86.614 48.323,84.138 U5.27@48.323,82.168
SEG14: LED1.2 U5.28 | length 57.4
  Top Layer w0.254: v1(44.323,120.98) 44.094,120.752 44.094,88.136 45.04,87.19 46.033,87.19 48.959,84.264 U5.28@48.959,82.168
  Bottom Layer w0.254: v1(44.323,120.98) 44.323,134.366 44.617,134.66 LED1.2@46.736,134.66
SEG15: LED1.5 U5.29 | length 49.2
  Top Layer w0.254: v1(44.958,121.539) 44.958,120.65 44.552,120.244 44.552,88.325 45.12,87.757 46.228,87.757 49.593,84.391 U5.29@49.593,82.168
  Bottom Layer w0.254: v1(44.958,121.539) 44.958,126.365 45.753,127.16 LED1.5@46.736,127.16
SOUND_OUT_PWM: JP116.3 U1.5 | length 105.7
  Top Layer w0.254: U1.5@60.203,57.917 60.203,59.85 63.345,62.992 67.183,62.992 68.58,64.389 v1(68.58,64.897) ; v1(70.993,75.773) 70.993,91.059 67.158,94.894 67.158,127.217 69.15,129.21 78.41,129.21 v1(82.55,133.35)
  Bottom Layer w0.254: v1(68.58,64.897) 70.104,66.421 70.104,74.884 v1(70.993,75.773) ; v1(82.55,133.35) 88.265,133.35 88.646,133.731 88.646,135.89 JP116.3@87.376,137.16
SPI_MISO: JP30.6 JP31.6 JP32.6 JP33.6 JP101.9 U1.22 U101.10 | length 114.1
  Top Layer w0.254: JP33.6@2.88,125.84 JP32.6@9.992,125.84 12.446,123.386 12.446,107.823 16.764,103.505 16.764,94.742 22.352,89.154 26.416,89.154 ; JP31.6@3.388,107.044 JP30.6@9.992,107.044 ; U101.10@26.782,92.475 26.782,89.52 26.416,89.154 ; U1.22@51.703,57.917 51.703,59.054 51.745,59.097 51.745,59.893 51.562,60.077 51.562,67.437 45.085,73.914 45.085,80.137 43.434,81.788 JP101.9@40.64,81.788 40.64,82.804 34.671,88.773 26.797,88.773 26.416,89.154
  Bottom Layer w0.254: JP30.6@9.992,107.044 12.683,107.044 v1(12.954,107.315)
SPI_MOSI: JP30.5 JP31.5 JP32.5 JP33.5 JP101.1 U1.21 U101.12 | length 115.7
  Top Layer w0.254: JP33.5@2.88,124.34 JP32.5@9.992,124.34 11.938,122.394 11.938,106.553 16.307,102.184 16.307,94.437 22.098,88.646 25.781,88.646 v1(26.289,88.138) ; JP31.5@3.388,105.544 JP30.5@9.992,105.544 ; v1(27.813,89.408) 28.082,89.677 U101.12@28.082,92.475 ; v1(34.417,86.741) 36.576,84.582 36.576,76.327 37.465,75.438 38.735,75.438 39.497,74.676 39.497,72.771 JP101.1@40.64,71.628 46.609,71.628 50.927,67.31 v1(50.927,62.103) ; U1.21@52.203,57.917 v5(52.203,60.143)
  Bottom Layer w0.254: JP30.5@9.992,105.544 11.945,105.544 v1(12.446,106.045) ; v1(26.289,88.138) 33.02,88.138 v1(34.417,86.741) ; 26.543,88.138 v1(27.813,89.408) ; v1(50.927,62.103) 51.054,62.103 52.203,60.954 v5(52.203,60.143)
SPI_SCK: JP30.4 JP31.4 JP32.4 JP33.4 JP101.7 U1.20 U101.11 | length 115
  Top Layer w0.254: JP33.4@2.88,122.84 JP32.4@9.992,122.84 11.43,121.402 v1(11.43,104.013) 13.386,104.013 15.85,101.549 15.85,94.132 21.844,88.138 25.019,88.138 25.654,87.503 34.544,87.503 39.37,82.677 39.37,80.518 JP101.7@40.64,79.248 ; JP31.4@3.388,104.044 JP30.4@9.992,104.044 ; v1(27.432,90.043) U101.11@27.432,92.475 ; v1(45.847,78.359) 45.593,78.105 45.593,74.168 52.019,67.742 52.019,61.519 52.832,60.706 52.832,60.066 52.66,59.893 52.66,59.097 52.703,59.054 U1.20@52.703,57.917
  Bottom Layer w0.254: JP30.4@9.992,104.044 10.023,104.013 v1(11.43,104.013) ; v1(25.527,87.63) 25.527,89.027 26.543,90.043 v1(27.432,90.043) ; JP101.7@40.64,79.248 42.291,79.248 43.18,78.359 v1(45.847,78.359)
SPI_SS2*: JP30.3 U1.23 | length 70
  Top Layer w0.254: JP30.3@9.992,102.544 12.319,100.217 12.319,96.774 22.098,86.995 31.623,86.995 35.814,82.804 35.814,70.612 37.465,68.961 42.031,68.961 51.203,59.79 U1.23@51.203,57.917
SPI_SS3*: JP31.3 U1.24 | length 77.7
  Top Layer w0.254: JP31.3@3.388,102.544 2.976,102.544 2.54,102.108 2.54,98.806 4.064,97.282 11.049,97.282 21.793,86.538 31.434,86.538 35.306,82.665 35.306,70.358 37.16,68.504 41.842,68.504 50.703,59.643 U1.24@50.703,57.917
SPI_SS4*: JP32.3 U1.25 | length 100.3
  Top Layer w0.254: JP32.3@9.992,121.34 10.922,120.41 10.922,116.967 1.778,107.823 1.778,98.679 3.683,96.774 10.91,96.774 21.705,85.979 31.346,85.979 34.849,82.476 34.849,70.053 36.855,68.047 41.652,68.047 50.203,59.496 U1.25@50.203,57.917
SPI_SS5*: JP33.3 U1.26 | length 98.2
  Top Layer w0.254: JP33.3@2.88,121.34 1.27,119.73 1.27,98.425 3.429,96.266 10.668,96.266 21.412,85.522 31.156,85.522 34.29,82.388 34.29,69.85 36.551,67.589 41.463,67.589 48.478,60.575 v1(48.478,59.98) ; U1.26@48.478,56.192 v1(48.478,56.86)
  Bottom Layer w0.254: v1(48.478,56.86) v1(48.478,59.98)
SPI_SS*: U1.19 U101.13 | length 49.9
  Top Layer w0.254: U101.13@28.732,92.475 28.732,90.521 29.845,89.408 35.052,89.408 v1(39.37,85.09) ; U1.19@53.203,57.917 v5(53.203,59.2)
  Bottom Layer w0.254: v1(39.37,85.09) 39.878,85.09 45.339,79.629 48.26,79.629 53.34,74.549 53.34,59.337 v5(53.203,59.2)
SW1: C60.2 S1.2 U1.18 | length 50.3
  Top Layer w0.254: v1(32.766,73.406) 33.782,72.39 33.782,66.548 36.449,63.881 43.688,63.881 49.022,58.547 49.022,57.658 50.292,56.388 53.43,56.388 53.703,56.66 U1.18@53.703,57.917
  Bottom Layer w0.254: S1.2@26.162,83.82 26.162,80.899 27.432,79.629 27.432,77.47 28.829,76.073 30.099,76.073 v1(32.766,73.406) 33.97,73.406 C60.2@35.306,72.07
SW2: C61.1 S2.2 U1.27 | length 38.9
  Top Layer w0.254: v1(31.369,73.406) 33.02,71.755 33.02,66.548 36.195,63.373 43.434,63.373 47.117,59.69 47.117,56.157 47.583,55.692 U1.27@48.478,55.692
  Bottom Layer w0.254: S2.2@26.162,78.232 26.162,77.724 30.48,73.406 v1(31.369,73.406) 32.512,72.263 C61.1@32.512,72.07
TCK: JP100.1 U1.93 | length 20.4
  Top Layer w0.254: U1.93@63.928,52.692 65.519,52.692 v1(67.945,55.245)
  Bottom Layer w0.254: v1(67.945,55.245) 74.389,61.562 74.389,61.689 JP100.1@78.74,66.04
TDI: JP100.9 U1.90 | length 17.3
  Top Layer w0.254: U1.90@63.928,51.192 66.559,51.192 v1(69.596,54.229)
  Bottom Layer w0.254: v1(69.596,54.229) 74.295,54.229 75.946,55.88 JP100.9@79.248,55.88
TDO: JP100.3 U1.91 | length 20.2
  Top Layer w0.254: U1.91@63.928,51.692 66.17,51.692 v1(69.596,55.118)
  Bottom Layer w0.254: v1(69.596,55.118) 77.978,63.5 JP100.3@79.248,63.5
TMS: JP100.5 U1.92 | length 19.3
  Top Layer w0.254: U1.92@63.928,52.192 65.781,52.192 v1(68.834,55.245) ; v1(74.93,61.341) 78.867,61.341 JP100.5@79.248,60.96
  Bottom Layer w0.254: v1(68.834,55.245) v1(74.93,61.341)
TOSC1: C6.2 U1.29 Y2.1 | length 7.3
  Top Layer w0.254: C6.2@43.114,58.928 43.114,58.685 46.554,55.245 46.736,55.245 47.289,54.692 U1.29@48.478,54.692
TOSC2: C7.2 U1.28 Y2.2 | length 9.1
  Top Layer w0.254: C7.2@43.114,61.468 44.145,60.437 44.145,58.644 Y2.2@45.553,57.237 45.553,57.075 47.436,55.192 U1.28@48.478,55.192
TXD1: RP2.8 U1.3 U100.11 | length 67.8
  Top Layer w0.254: RP2.8@11.506,29.337 13.716,29.337 14.097,28.956 14.097,27.178 15.179,26.096 v1(17.968,26.096) ; v1(25.197,30.607) 36.678,42.088 v1(44.577,42.088) ; v1(52.578,44.958) 56.642,49.022 56.642,49.784 61.203,54.345 U1.3@61.203,57.917
  Bottom Layer w0.254: v1(17.968,26.096) 22.479,30.607 v1(25.197,30.607) ; v1(44.577,42.088) 49.708,42.088 v1(52.578,44.958)
TXD2: RP2.6 U1.46 U100.10 | length 50.6
  Top Layer w0.254: RP2.6@11.557,27.686 v2(12.446,27.686) ; v2(14.859,28.321) 15.814,27.366 v1(17.968,27.366) ; v1(25.197,31.648) 36.347,42.799 v1(44.094,42.799) ; U1.46@48.478,46.192 49.482,46.192 50.419,47.129 v1(50.419,47.498)
  Bottom Layer w0.254: v2(12.446,27.686) 13.081,28.321 v2(14.859,28.321) ; v1(17.968,27.366) 21.666,31.064 24.613,31.064 v1(25.197,31.648) ; v1(44.094,42.799) 45.72,42.799 v1(50.419,47.498)
VBAT: C39.1 C42.1 C44.1 C45.1 JP122.1 L1.1 R3.2 R201.1 S3.2 S3.5 VR2.1 | length 36.9
  Top Layer w0.508: R3.2@131.13,83.82 v3(131.13,85.689)
  Top Layer w0.52: 120.904,91.186 121.158,91.44 ; 124.968,96.012 126.492,97.536 126.492,109.359
  Top Layer w1.016: 97.028,126.746 R201.1@97.028,132.146 ; VR2.1@120.904,87.63 120.904,91.186 ; 121.158,91.44 124.526,91.44
  Bottom Layer w0.508: v3(122.961,86.258) 130.561,86.258 v3(131.13,85.689)
VBATIN: FH_8.1 JP123.1 JP124.1
VBATSENSE: R201.2 R202.1 U1.89 | length 115.3
  Top Layer w0.254: U1.89@63.928,50.692 62.973,50.692 62.357,51.308 62.357,52.578 61.976,52.959 61.976,53.467 62.738,54.229 62.738,56.642 71.12,65.024 v1(71.12,65.786) ; v1(71.628,75.438) 71.628,78.734 71.45,78.912 71.45,91.364 68.199,94.615 68.199,125.857 70.612,128.27 78.74,128.27 v1(80.645,130.175) ; v1(84.709,130.175) 90.17,130.175 91.821,131.826 91.821,133.096 92.771,134.046 R202.1@93.98,134.046
  Top Layer w1.016: R202.1@93.98,134.046 R201.2@97.028,134.046
  Bottom Layer w0.254: v1(71.12,65.786) 70.618,66.288 70.618,74.428 v1(71.628,75.438) ; v1(80.645,130.175) v1(84.709,130.175)
WR*: U1.51 U3.12 | length 11.6
  Top Layer w0.254: U1.51@50.203,42.467 50.203,41.44 50.195,41.432 50.195,41.386 49.376,40.567 49.376,36.168 51.789,33.755 U3.12@51.789,32.171
XTAL1: C5.2 U1.34 Y1.2 | length 18.1
  Top Layer w0.254: C5.2@37.216,49.086 37.416,49.286 Y1.2@40.838,49.286 ; U1.34@48.478,52.192 v5(50.704,52.192)
  Bottom Layer w0.254: Y1.2@40.838,49.286 40.838,51.15 41.879,52.192 v5(50.704,52.192)
XTAL2: C4.2 U1.33 Y1.1 | length 14.8
  Top Layer w0.254: C4.2@37.216,54.166 Y1.1@40.838,54.166 ; U1.33@48.478,52.692 49.821,52.692 v1(49.936,52.807)
  Bottom Layer w0.254: Y1.1@40.838,54.166 42.197,52.807 v1(49.936,52.807)
pads on no net: CON1. CON1.12 FH_8. H1.1 H2.1 H3.1 H4.1 J100.9 J101.9 JP100.8 JP102.nc U1.1 U1.98 U5.6 U5.7 U5.20 U5.30 U101.6 U101.9 VR3.4

## Polygon pours and split planes (outlines as drawn)
GND on Top Layer (hatched 90Degree grid 0.254 track 0.254, remove dead copper): 75.184,76.327 75.184,78.867 88.214,78.867 88.214,76.683 85.395,76.683 85.395,77.318 80.493,77.318 79.502,76.327
GND on Top Layer (hatched 90Degree grid 0.508 track 0.508): 105.918,103.886 104.14,103.886 101.6,98.806 99.314,93.98 98.806,92.964 97.79,90.678 96.774,88.646 96.774,84.582 93.472,84.582 93.472,79.248 107.696,79.248 107.696,86.36 105.664,88.392 105.918,88.138
VBAT on Top Layer (hatched 90Degree grid 0.254 track 0.254, remove dead copper): 124.181,96.495 124.181,103.683 125.349,103.683 125.349,110.134 128.194,110.134 128.194,96.571 124.689,93.066
GND on Top Layer (hatched 90Degree grid 0.254 track 0.254, remove dead copper): 120.498,97.333 120.498,104.648 123.495,104.648 123.495,97.282 120.498,97.282
VBAT on Top Layer (hatched 90Degree grid 0.254 track 0.254, remove dead copper): 102.26,132.74 106.35,132.74 106.35,124.46 100.076,124.46 100.076,129.921
GND on Top Layer (hatched 90Degree grid 0.508 track 0.52): 82.042,101.346 82.042,96.774 82.042,96.266 79.502,96.266 79.502,93.98 80.518,92.964 86.614,92.964 86.614,91.44 91.694,91.44 97.028,91.44 103.632,104.648 124.587,104.648 124.536,108.458 114.046,108.458 109.22,113.284 93.98,113.284 93.98,110.236 93.472,109.728 88.138,104.394 88.138,101.6 82.042,101.6
VBAT on Top Layer (hatched 90Degree grid 0.508 track 0.52): 106.68,103.886 119.634,103.886 119.634,96.266 124.968,96.266 124.968,85.598 118.872,85.598 118.872,90.678 106.68,90.678
12V on Top Layer (hatched 90Degree grid 0.508 track 0.508): 117.856,89.916 117.856,83.058 110.236,83.083 110.236,80.264 108.712,80.264 108.712,86.868 106.934,88.646 106.934,89.916
VBATIN on Top Layer (hatched 90Degree grid 0.508 track 0.508): 139.192,121.92 110.744,121.92 109.22,123.444 109.22,132.08 115.824,132.08 115.824,126.492 121.92,126.492 125.984,130.556 125.984,139.192 139.192,139.192
NetFH_8_2 on Top Layer (hatched 90Degree grid 0.508 track 0.508): 115.57,115.062 127.117,115.062 127.117,110.744 139.192,110.744 139.192,121.158 115.57,121.158
5V on Top Layer (hatched 90Degree grid 0.508 track 0.52): 77.724,93.218 77.724,79.502 88.9,79.502 88.9,74.168 92.71,74.168 92.71,85.344 96.012,85.344 96.012,89.154 86.106,89.154 86.106,92.202 80.01,92.202 78.994,93.218
NetD1_2 on Top Layer (hatched 90Degree grid 0.508 track 0.52): 75.759,101.6 72.39,101.6 72.39,79.502 76.962,79.502 76.962,97.536 75.999,98.552 75.999,101.6
VBAT on Top Layer (hatched 90Degree grid 0.508 track 0.52): 126.492,109.22 114.3,109.22 109.474,114.046 93.98,114.046 93.98,118.11 90.678,118.11 88.9,119.888 88.9,129.286 100.584,129.286 100.584,127.762 103.378,127.762 110.236,121.158 114.808,121.158 114.808,114.3 126.492,114.3
NetC40_1 on Top Layer (hatched 90Degree grid 0.508 track 0.52): 77.183,103.246 77.183,99.822 77.724,99.822 77.724,103.124 77.47,103.124
GND on Top Layer (hatched 90Degree grid 0.508 track 0.508, remove dead copper): 77.316,104.013 71.12,104.013 71.12,124.063 72.8,125.984 82.042,125.984 82.042,113.138
NetC40_1 on Top Layer (hatched 90Degree grid 0.508 track 0.52): 76.962,103.524 77.682,102.616 87.122,102.616 87.122,104.648 87.333,104.648 93.175,110.536 93.175,118.004 90.071,118.004 88.794,119.588 88.794,127.508 83.269,127.508 83.269,114.3 84.912,114.3 84.912,108.712 76.962,108.712
GND on Top Layer (hatched 90Degree grid 0.61 track 0.635, remove dead copper): 0.762,138.811 90.424,138.811 90.424,130.429 84.201,130.429 80.899,127.127 72.644,127.127 70.104,124.587 70.104,102.997 71.374,101.727 71.374,78.531 74.168,78.531 74.168,71.628 93.599,71.628 93.599,78.232 100.076,78.232 100.076,75.438 103.378,72.136 125.73,72.136 125.73,66.421 138.811,66.421 138.811,0.762 0.635,0.762
GND on Bottom Layer (hatched 90Degree grid 0.508 track 0.533, remove dead copper): 91.821,139.192 139.192,139.192 139.192,105.283 112.903,105.283 112.903,112.522 110.236,115.189 105.918,115.316 103.251,118.872 99.695,123.571 99.695,130.048 91.821,130.048
GND on Bottom Layer (hatched 90Degree grid 0.254 track 0.254, remove dead copper): 101.346,123.063 98.552,123.063 98.552,129.413 84.963,129.413 81.534,125.984 73.025,125.984 71.374,124.333 71.374,104.267 72.644,102.997 72.644,79.629 100.33,79.629 100.33,99.314 103.505,105.029 112.141,105.029 112.141,112.014 109.474,114.681 106.045,114.681 106.045,116.078
GND on Bottom Layer (hatched 90Degree grid 0.254 track 0.254, remove dead copper): 113.284,105.791 113.284,103.886 104.013,103.886 101.092,98.044 101.092,76.327 103.886,73.533 125.73,73.533 125.73,94.488 127.889,96.647 127.889,105.664
GND on Bottom Layer (hatched 90Degree grid 0.254 track 0.254, remove dead copper): 129.032,105.664 129.032,96.266 126.619,93.853 126.619,67.564 139.192,67.564 139.192,105.283
GND on Bottom Layer (hatched 90Degree grid 0.61 track 0.635, remove dead copper): 0.762,138.811 90.424,138.811 90.424,130.429 84.201,130.429 80.899,127.127 72.644,127.127 70.104,124.587 70.104,102.997 71.374,101.727 71.374,78.531 74.168,78.531 74.168,71.628 93.599,71.628 93.599,79.629 100.076,79.629 100.076,75.438 103.378,72.136 125.73,72.136 125.73,66.421 138.811,66.421 138.811,0.762 0.635,0.762
GND on Bottom Layer (hatched 90Degree grid 0.61 track 0.635, remove dead copper): 93.98,72.771 93.98,78.867 74.93,78.867 74.93,72.771

## Keep-outs
Keep-Out Layer:
  lines w0.254: 0,0 139.7,0 139.7,139.7 0,139.7 0,0

## Silkscreen, mask and mechanical layers (free items; w line width, h text height)
Top Overlay:
  text "VBS Sumo" at 95.377,62.357 h1.52
  text "V1.0" at 95.504,59.309 h1.52
Mechanical 1:
  lines w0.254: -8.132,-0.132 -2.132,-0.132 ; -8.132,139.868 -2.132,139.868 ; -5.64,1.392 -5.132,-0.132 ; -5.64,138.344 -5.132,139.868 ; -5.132,64.129 -5.132,-0.132 ; -5.132,75.607 -5.132,139.868 ; -4.624,1.392 -5.132,-0.132 ; -4.624,138.344 -5.132,139.868 ; -0.132,141.868 -0.132,147.868 ; 1.392,144.36 -0.132,144.868 ; 1.392,145.376 -0.132,144.868 ; 3.476,-20.508 3.476,-0.508 ; 5,-11.016 3.476,-10.508 ; 5,-10 3.476,-10.508 ; 64.129,144.868 -0.132,144.868 ; 64.237,-10.508 3.476,-10.508 ; 75.607,144.868 139.868,144.868 ; 75.715,-10.508 136.476,-10.508 ; 134.952,-11.016 136.476,-10.508 ; 134.952,-10 136.476,-10.508 ; 136.476,-20.508 136.476,-0.508 ; 138.344,144.36 139.868,144.868 ; 138.344,145.376 139.868,144.868 ; 139.868,141.868 139.868,147.868 ; 142.008,3.476 162.008,3.476 ; 142.008,136.476 162.008,136.476 ; 151.5,5 152.008,3.476 ; 151.5,134.952 152.008,136.476 ; 152.008,64.237 152.008,3.476 ; 152.008,75.715 152.008,136.476 ; 152.516,5 152.008,3.476 ; 152.516,134.952 152.008,136.476
  text "140 (mm)" at 64.383,143.954 h1.52
  text "133 (mm)" at 152.922,64.491 h1.52 r90
  text "140 (mm)" at -4.218,64.383 h1.52 r90
  text "133 (mm)" at 64.491,-11.422 h1.52

## Dimensions
136.5,136.5 to 145,145 on Mechanical 1

## Text inside footprints (layer, text, board x,y; h text height)
J100: Top Overlay "1" at 12.291,39.963 h1.5 r90; Top Overlay "5" at 12.291,50.793 h1.5 r90; Top Overlay "9" at 6.516,51.153 h1.5 r90; Top Overlay "6" at 6.516,39.353 h1.5 r90
J101: Top Overlay "1" at 26.515,39.963 h1.5 r90; Top Overlay "5" at 26.515,50.793 h1.5 r90; Top Overlay "9" at 20.74,51.153 h1.5 r90; Top Overlay "6" at 20.74,39.353 h1.5 r90
JP100: Top Overlay "10" at 81.28,54.356 h1.27 r270; Top Overlay "9" at 78.74,54.356 h1.27 r270; Top Overlay "1" at 78.74,68.072 h1.27 r270; Top Overlay "2" at 81.28,68.58 h1.27 r270
JP101: Top Overlay "10" at 38.608,83.312 h1.27 r90; Top Overlay "9" at 41.148,83.312 h1.27 r90; Top Overlay "1" at 41.148,69.596 h1.27 r90; Top Overlay "2" at 38.608,69.088 h1.27 r90